# Altium PCB PCB1V1.2.PcbDoc (part 1 of 3)
Units mm, origin at the board's own origin, x right, y up, seen from the top; angles counter-clockwise.
Board outline 74.8 x 89.66 mm, 2 copper layers (Top Layer, Bottom Layer); 292 components, 184 nets, 916 pads, 196 vias.
Unrouted connection lines stored in the file: 106.
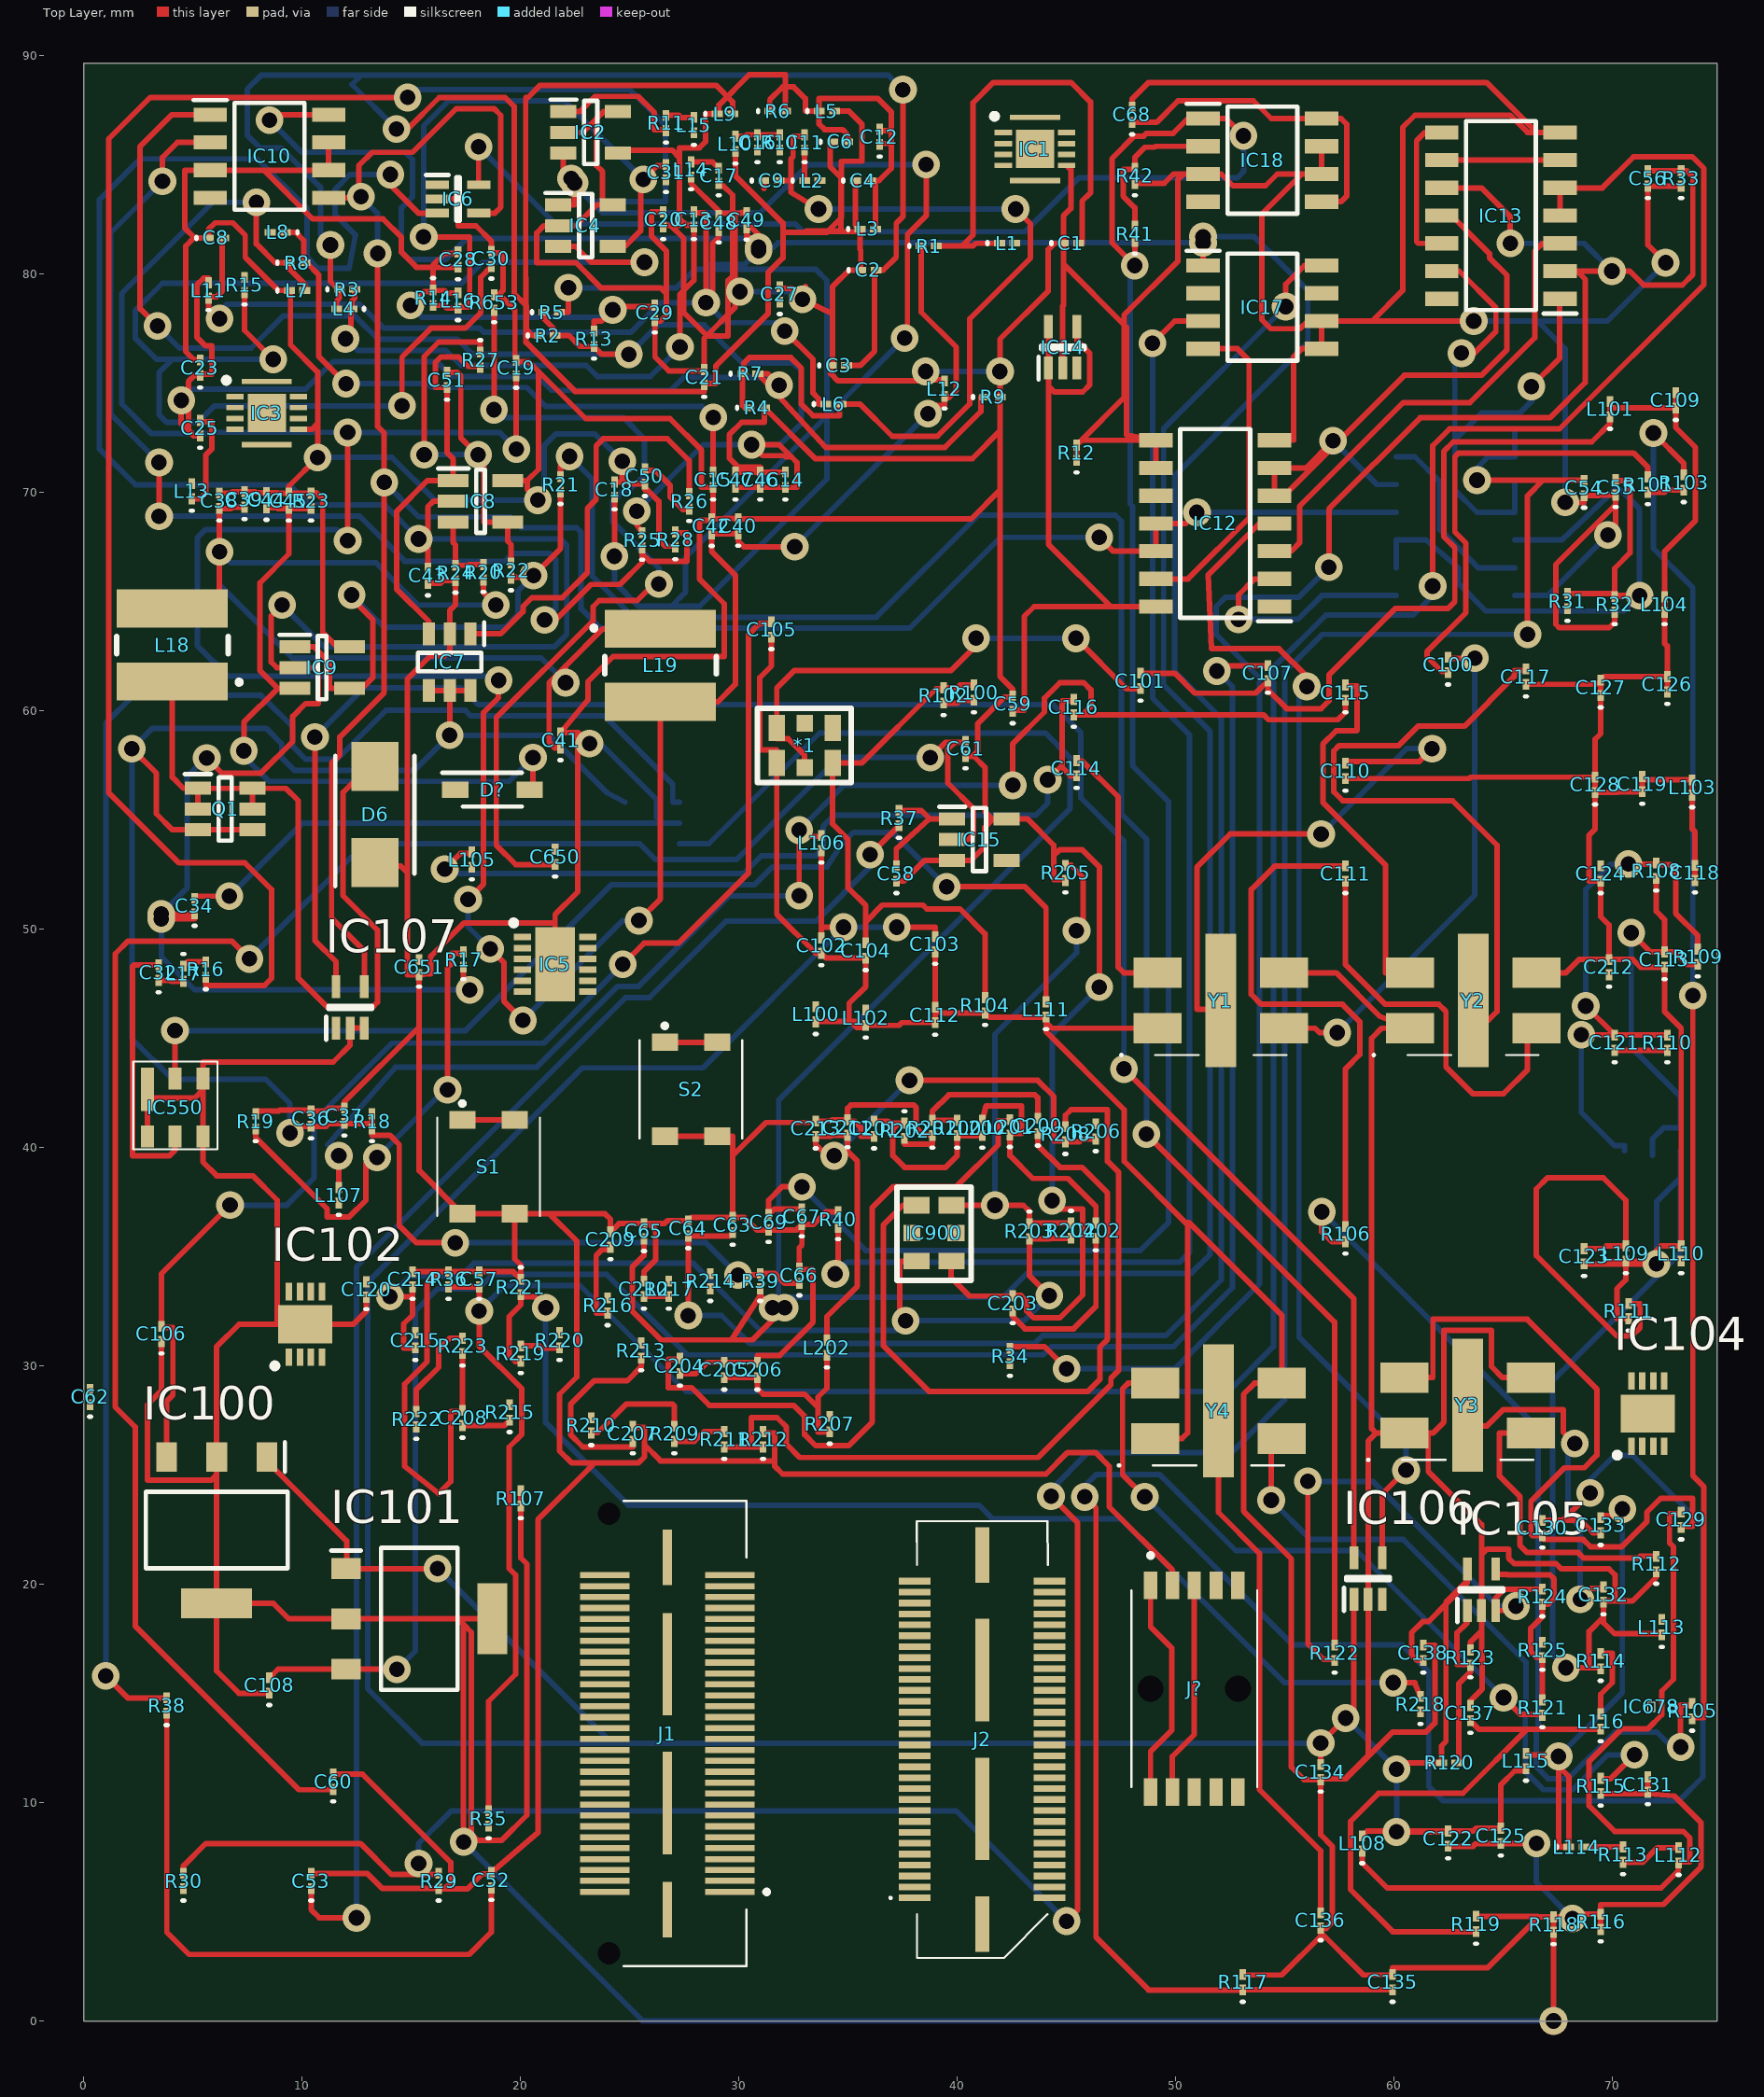
[diagram p0: Top Layer view]
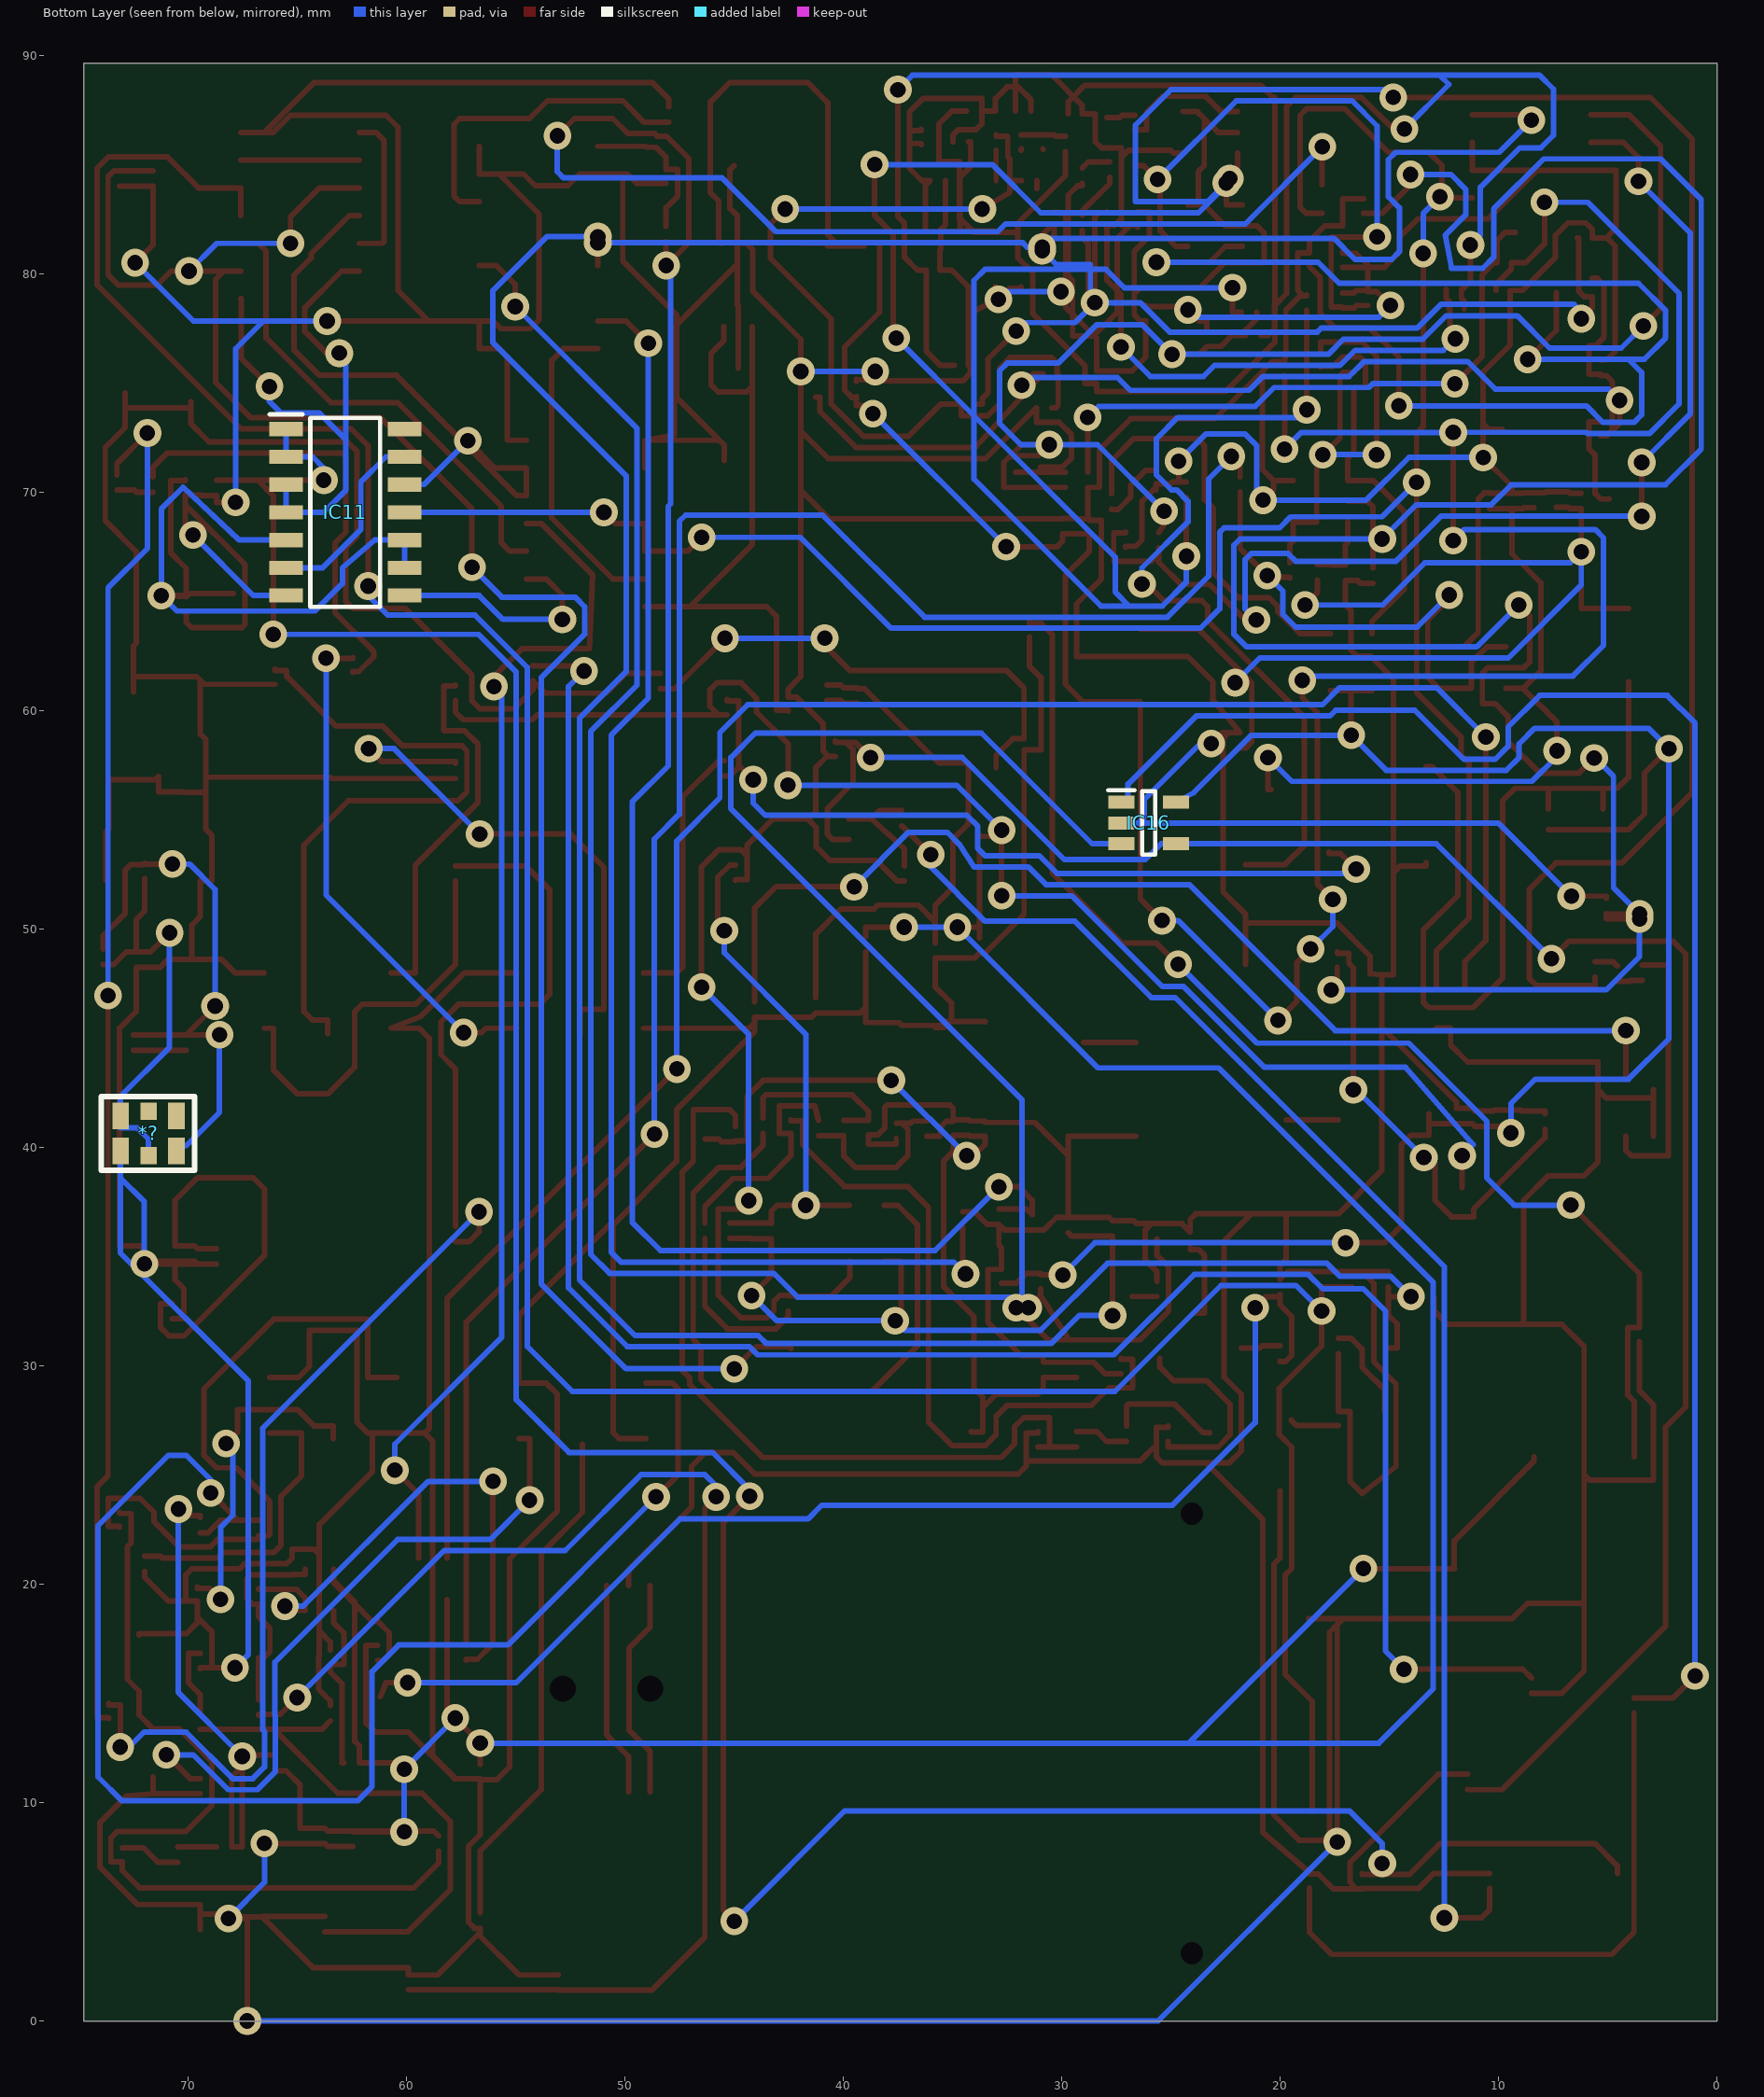
[diagram p1: Bottom Layer view, seen from below]

## Layer stack, top to bottom
Top Solder: solder mask 0.0102, Solder Resist, Dk 3.5
Top Layer: signal copper 0.0356
Dielectric 1: dielectric 0.32, FR-4, Dk 4.8
Bottom Layer: signal copper 0.0356
Bottom Solder: solder mask 0.0102, Solder Resist, Dk 3.5

## Board outline
0,0 74.803,0 74.803,89.662 0,89.662

## Design rules (kind name [scope] priority, off if disabled: settings)
Clearance [All] p1: gap=0.254 ignorepadtopadclearanceinfootprint=FALSE except(0: Arc-Hole Track-Hole SMDPad-SMDPad SMDPad-Hole THPad-Hole Via-Hole Fill-Hole Poly-Hole Region-Hole Text-Hole)
PolygonConnect [All] p1: connectstyle=Relief reliefconductorwidth=0.254 reliefentries=4 polygonreliefangle="90 Angle" airgapwidth=0.254
RoutingVias [All] p1: holewidth=0.711 width=1.27 viastyle="Through Hole" minholewidth=0.711 minwidth=1.27 maxholewidth=0.711 maxwidth=1.27
SolderMaskExpansion [All] p1: expansion=0.102 istentingtop=FALSE
Width [All] p1: maxlimit=0.254 minlimit=0.254 preferedwidth=0.254
30 further rules are at their usual default settings.

## Classes and differential pairs
component class TELEMETRY: C200 C201 C202 C203 C204 C205 C206 C207 C208 C209 C210 C211 C212 C213 C214 C215 IC200 IC201 IC202 IC203 IC900 L200 L201 L202 R200 R201 R202 R203 R204 R205 R206 R207 R208 R209 R210 R211 R212 R213 R214 R215 R216 R217 R218 R219 R220 R221 R222 R223
component class Sheet1: C52 C53 C54 C55 C56 C57 C58 C59 C60 C61 C62 C63 C64 C65 C66 C67 C68 C69 IC11 IC12 IC13 IC14 IC15 IC16 IC17 IC18 J1 J2 J? R29 R30 R31 R32 R33 R34 R35 R36 R37 R38 R39 R40 R41 R42 S1 S2
component class PA: C1 C2 C3 C4 C6 C8 C9 C11 C12 C13 C14 C15 C16 C17 C18 C19 C20 C21 C23 C25 C27 C28 C29 C30 C31 C32 C34 C36 C37 C38 C39 C40 C41 C42 C43 C44 C45 C46 C47 C48 C49 C50 C51 C650 C651 D6 D? IC1 IC2 IC3 IC4 IC5 IC6 IC7 IC8 IC9 IC10 L1 L2 L3 L4 L5 L6 L7 L8 L9 L10 L11 L12 L13 L14 L15 L16 L17 L18 L19 Q1 R1 R2 R3 R4 R5 R6 R7 R8 R9 R10 R11 R12 R13 R14 R15 R16 R17 R18 R19 R20 R21 R22 R23 R24 R25 R26 R27 R28 R653
component class "Mixers and IF": *1 *? C100 C101 C102 C103 C104 C105 C106 C107 C108 C109 C110 C111 C112 C113 C114 C115 C116 C117 C118 C119 C120 C121 C122 C123 C124 C125 C126 C127 C128 C129 C130 C131 C132 C133 C134 C135 C136 C137 C138 IC100 IC101 IC102 IC103 IC104 IC105 IC106 IC107 IC550 IC678 L100 L101 L102 L103 L104 L105 L106 L107 L108 L109 L110 L111 L112 L113 L114 L115 L116 R100 R101 R102 R103 R104 R105 R106 R107 R108 R109 R110 R111 R112 R113 R114 R115 R116 R117 R118 R119 R120 R121 R122 R123 R124 R125 Y1 Y2 Y3 Y4

## Components (designator, comment, footprint, x,y, rotation, side; value= is the part's Value field where it differs from the comment)
*1 "MQF326D REp" MQF326D 31.743,57.603 r0 top
*? "MQF326D REp" MQF326D 73.111,39.835 r180 bottom
C1 "Cap" 0603 45.212,81.407 r0 top value=33pF
C2 "Cap" 0603 35.937,80.18 r0 top value=1uF
C3 "Cap" 0603 34.588,75.814 r0 top value=470pF
C4 "Cap" 0603 35.687,84.28 r0 top value=12pF
C6 "Cap" 0603 34.64,86.058 r0 top value=5.1pF
C8 "Cap" 0603 6.065,81.661 r0 top value=10pF
C9 "Cap" 0603 31.496,84.28 r0 top value=5.1pF
C11 "Cap" 0603 33.02,86.027 r90 top value=470pF
C12 "Cap" 0603 36.449,86.281 r90 top value=470pF
C13 "Cap" 0603 27.94,82.502 r90 top value=470pF
C14 "Cap" 0603 32.131,70.581 r90 top value=10nF
C15 "Cap" 0603 28.829,70.581 r90 top value=33pF
C16 "Cap" 0603 30.861,86.027 r90 top value=6.8pF
C17 "Cap" 0603 29.083,84.503 r90 top value=470pF
C18 "Cap" 0603 24.305,70.129 r90 top value=470pF
C19 "Cap" 0603 19.812,75.692 r90 top value=470pF
C20 "Cap" 0603 26.543,82.502 r90 top value=5.1pF
C21 "Cap" 0603 28.417,75.28 r90 top value=16pF
C23 "Cap" 0603 5.334,75.709 r90 top value=5.1pF
C25 "Cap" 0603 5.334,72.946 r90 top value=470pF
C27 "Cap" 0603 31.873,79.068 r90 top value=12pF
C28 "Cap" 0603 17.145,80.662 r90 top value=470pF
C29 "Cap" 0603 26.162,78.224 r90 top value=1uF
C30 "Cap" 0603 18.669,80.693 r90 top value=470pF
C31 "Cap" 0603 26.67,84.661 r90 top value=470pF
C32 "Cap" 0603 3.429,48.006 r90 top value=470pF
C34 "Cap" 0603 5.08,51.054 r90 top value=1uF
C36 "Cap" 0603 10.414,41.323 r90 top value=4.7uF
C37 "Cap" 0603 11.938,41.45 r90 top value=4.7uF
C38 "Cap" 0603 6.223,69.613 r90 top value=22uF
C39 "Cap" 0603 7.366,69.675 r90 top value=22uF
C40 "Cap" 0603 29.972,68.453 r90 top value=47uF
C41 "Cap" 0603 21.844,58.643 r90 top value=.1uF
C42 "Cap" 0603 28.75,68.447 r90 top value=47uF
C43 "Cap" 0603 15.761,66.184 r90 top value=1uF
C44 "Cap" 0603 8.382,69.644 r90 top value=4.7uF
C45 "Cap" 0603 9.398,69.613 r90 top value=4.7uF
C46 "Cap" 0603 30.988,70.581 r90 top value=4.7uF
C47 "Cap" 0603 29.845,70.581 r90 top value=4.7uF
C48 "Cap" 0603 29.083,82.344 r90 top value=1uF
C49 "Cap" 0603 30.353,82.471 r90 top value=470pF
C50 "Cap" 0603 25.702,70.733 r90 top value=220pF
C51 "Cap" 0603 16.637,75.153 r90 top value=.1uF
C52 "Cap" 0603 18.669,6.446 r90 top value=470pF
C53 "Cap" 0603 10.418,6.412 r90 top value=470pF
C54 "Cap" 0603 68.707,70.2 r90 top value=470pF
C55 "Cap" 0603 70.152,70.231 r90 top value=470pF
C56 "Cap" 0603 71.628,84.376 r90 top value=470pF
C57 "Cap" 0603 18.113,33.965 r90 top value=470pF
C58 "Cap" 0603 37.211,52.547 r90 top value=470pF
C59 "Cap" 0603 42.545,60.325 r90 top value=.1uF
C60 "Cap" 0603 11.43,10.953 r90 top value=.1uF
C61 "Cap" 0603 40.386,58.262 r90 top value=.1uF
C62 "Cap" 0603 0.3,28.575 r90 top value=470pF
C63 "Cap" 0603 29.718,36.449 r90 top value=4.7uF
C64 "Cap" 0603 27.686,36.291 r90 top value=4.7uF
C65 "Cap" 0603 25.654,36.164 r90 top value=.1uF
C66 "Cap" 0603 32.766,34.132 r90 top value=.1uF
C67 "Cap" 0603 32.893,36.83 r90 top value=4.7uF
C68 "Cap" 0603 48.006,87.297 r90 top value=1uF
C69 "Cap" 0603 31.369,36.576 r90 top value=4.7uF
C100 "Cap" 0603 62.484,62.103 r90 top value=470pF
C101 "Cap" 0603 48.387,61.372 r90 top value=1nF
C102 "Cap" 0603 33.782,49.245 r90 top value=1nF
C103 "Cap" 0603 38.989,49.307 r90 top value=1nF
C104 "Cap" 0603 35.814,49.022 r90 top value=1nF
C105 "Cap" 0603 31.496,63.723 r90 top value=4.7uF
C106 "Cap" 0603 3.556,31.465 r90 top value=4.7uF
C107 "Cap" 0603 54.229,61.722 r90 top value=4.7uF
C108 "Cap" 0603 8.509,15.367 r90 top value=4.7uF
C109 "Cap" 0603 72.898,74.216 r90 top value=16pF
C110 "Cap" 0603 57.785,57.246 r90 top value=1.8pF
C111 "Cap" 0603 57.785,52.547 r90 top value=470pF
C112 "Cap" 0603 38.989,46.07 r90 top value=22pF
C113 "Cap" 0603 72.39,48.61 r90 top value=470pF
C114 "Cap" 0603 45.466,57.373 r90 top value=470pF
C115 "Cap" 0603 57.785,60.833 r90 top value=470pF
C116 "Cap" 0603 45.339,60.167 r90 top value=.5pF
C117 "Cap" 0603 66.04,61.564 r90 top value=1.8pF
C118 "Cap" 0603 73.787,52.578 r90 top value=82pF
C119 "Cap" 0603 71.374,56.642 r90 top value=82pF
C120 "Cap" 0603 12.954,33.497 r90 top value=1nF
C121 "Cap" 0603 70.104,44.8 r90 top value=1nF
C122 "Cap" 0603 62.484,8.351 r90 top value=1.8pF
C123 "Cap" 0603 68.707,35.021 r90 top value=1.8pF
C124 "Cap" 0603 69.469,52.547 r90 top value=1.8pF
C125 "Cap" 0603 64.897,8.478 r90 top value=1nF
C126 "Cap" 0603 72.517,61.214 r90 top value=1.8pF
C127 "Cap" 0603 69.469,61.056 r90 top value=3.9pF
C128 "Cap" 0603 69.215,56.611 r90 top value=1.8pF
C129 "Cap" 0603 73.152,22.956 r90 top value=470pF
C130 "Cap" 0603 66.802,22.575 r90 top value=1.2pF
C131 "Cap" 0603 71.628,10.826 r90 top value=470pF
C132 "Cap" 0603 69.596,19.527 r90 top value=1.8pF
C133 "Cap" 0603 69.469,22.702 r90 top value=470pF
C134 "Cap" 0603 56.642,11.399 r90 top value=1nF
C135 "Cap" 0603 59.94,1.778 r90 top value=1nF
C136 "Cap" 0603 56.642,4.603 r90 top value=1.8pF
C137 "Cap" 0603 63.5,14.097 r90 top value=1nF
C138 "Cap" 0603 61.341,16.86 r90 top value=1nF
C200 "Cap" 0603 43.688,40.99 r90 top value=10nF
C201 "Cap" 0603 36.195,40.863 r90 top value=180pF
C202 "Cap" 0603 46.355,36.195 r90 top value=560pF
C203 "Cap" 0603 42.545,32.862 r90 top value=270pF
C204 "Cap" 0603 27.305,29.998 r90 top value=270pF
C205 "Cap" 0603 29.337,29.814 r90 top value=1nF
C206 "Cap" 0603 30.861,29.814 r90 top value=4.7uF
C207 "Cap" 0603 25.146,26.893 r90 top value=2.2pF
C208 "Cap" 0603 17.351,27.615 r90 top value=2.2pF
C209 "Cap" 0603 24.13,35.783 r90 top value=2.2pF
C210 "Cap" 0603 25.654,33.528 r90 top value=2.2pF
C211 "Cap" 0603 34.986,40.913 r90 top value=1nF
C212 "Cap" 0603 69.85,48.26 r90 top value=10nF
C213 "Cap" 0603 33.528,40.863 r90 top value=1nF
C214 "Cap" 0603 15.065,33.965 r90 top value=4.7uF
C215 "Cap" 0603 15.192,31.171 r90 top value=4.7uF
C650 "Cap" 0603 21.59,53.309 r90 top value=39pF
C651 "Cap" 0603 15.367,48.26 r90 top value=39pF
D6 "MBRS120T3G" DIOM5436X247N 13.335,55.245 r90 top
D? "BAT46W-7-F" SOD3716X145N 18.718,56.388 r0 top
IC1 "RFPA0133TR7" QFN50P300X300X86-17N-D 43.561,85.725 r0 top
IC2 "RF2878SR" SOT95P280X159-5N 23.221,86.487 r0 top
IC3 "RFPA0133TR7" QFN50P300X300X86-17N-D 8.386,73.634 r0 top
IC4 "RF2878SR" SOT95P280X159-5N 22.987,82.217 r0 top
IC5 "LTC5533EDE#PBF" SON50P300X400X85-13N-D 21.59,48.387 r0 top
IC6 "FPF2000" SOT65P210X110-5N 17.145,83.439 r0 top
IC7 "LTC1772CS6#TRMPBF" SOT95P280X100-6N 16.764,62.23 r270 top
IC8 "MCP6231UT-E_OT" SOT95P270X145-5N 18.174,69.596 r0 top
IC9 "MCP6231UT-E_OT" SOT95P270X145-5N 10.922,61.976 r0 top
IC10 "LT1963AES8-3.3#PBF" SOIC127P599X175-8N 8.509,85.392 r0 top
IC11 "SN74HC00D" SOIC127P600X175-14N 62.82,69.088 r180 bottom
IC12 "MM74HC02M" SOIC127P600X175-14N 51.816,68.58 r180 top
IC13 "SN74HC00D" SOIC127P600X175-14N 64.897,82.677 r180 top
IC14 "FPF2000" SOT65P210X110-5N 44.831,76.642 r90 top
IC15 "TMP36GRTZ-REEL7" SOT95P280X145-5N 41.021,54.102 r0 top
IC16 "INA194AIDBVT" SOT95P280X145-5N 26.035,54.864 r180 bottom
IC17 "FPF2700MX" SOIC127P600X175-8N 53.975,78.486 r0 top
IC18 "LT1963AES8-3.3#PBF" SOIC127P599X175-8N 53.975,85.217 r0 top
IC100 "LT1963EST-2.5" SOT230P700X180-4N 6.096,22.479 r270 top
IC101 "LT1963EST-2.5" SOT230P700X180-4N 15.367,18.415 r0 top
IC102 "LT5560EDD#PBF" SON50P300X300X80-9N-D 10.156,31.901 r90 top
IC104 "LT5560EDD#PBF" SON50P300X300X80-9N-D 71.628,27.813 r90 top
IC105 "MCP6231UT-E_LT" SOT65P210X110-5N 64.008,19.746 r90 top
IC106 "FPF2004" SOT65P210X110-5N 58.816,20.254 r90 top
IC107 "FPF2000" SOT65P210X110-5N 12.207,46.416 r90 top
IC550 "AFS434S3-T" AFS434S3 6.155,39.879 r90 top
IC678 "rf2637" RF2637 71.755,14.307 r90 top
IC900 "MQF326D REp" MQF326D 39.751,34.798 r90 top
J1 "QSH-030-01-L-D-A-K" QSH03001LDAK 26.726,13.164 r90 top
J2 "QTH-030-02-L-D-A" QTH03002LDA 41.148,12.89 r90 top
J? "FSI-105-06-L-D-AD-TR" FSI10506LDADTR 50.857,15.218 r0 top
L1 "Inductor" 0603 42.291,81.407 r0 top value=8.7nH
L2 "Inductor" 0603 33.37,84.28 r0 top value=18nH
L3 "Inductor" 0603 35.906,82.068 r0 top value=10.4nH
L4 "Inductor" 0603 11.938,78.407 r180 top value=18nH
L5 "Inductor" 0603 34.036,87.455 r0 top value=25nH
L6 "Inductor" 0603 34.338,74.041 r0 top value=25nH
L7 "Inductor" 0603 9.779,79.248 r0 top value=18nH
L8 "Inductor" 0603 8.89,81.915 r180 top value=8.7nH
L9 "Inductor" 0603 29.368,87.328 r0 top value=25nH
L10 "Inductor" 0603 29.845,85.962 r90 top value=18nH
L11 "Inductor" 0603 5.715,79.248 r90 top value=25nH
L12 "Inductor" 0603 39.418,74.747 r90 top value=18nH
L13 "Inductor" 0603 4.953,70.056 r90 top value=18nH
L14 "Inductor" 0603 27.813,84.788 r90 top value=10.4nH
L15 "Inductor" 0603 27.94,86.82 r90 top value=39nH
L16 "Inductor" 0603 17.145,78.788 r90 top value=18nH
L17 "Inductor" 0603 4.572,47.958 r270 top value=39nH
L18 "MSS5131-472MLB" MSS5131 4.064,63.011 r180 top
L19 "MSS5131-103MLB" MSS5131 26.416,62.084 r0 top
L100 "Inductor" 0603 33.528,46.101 r90 top value=18nH
L101 "Inductor" 0603 69.898,73.81 r90 top value=10mH
L102 "Inductor" 0603 35.814,45.943 r90 top value=18nH
L103 "Inductor" 0603 73.66,56.484 r90 top value=?????
L104 "Inductor" 0603 72.39,64.866 r90 top value=?????
L105 "Inductor" 0603 17.78,53.182 r90 top value=2.7uH
L106 "Inductor" 0603 33.782,53.944 r90 top value=8.2uH
L107 "Inductor" 0603 11.684,37.815 r90 top value=2.7uH
L108 "Inductor" 0603 58.547,8.128 r90 top value=8.2uH
L109 "Inductor" 0603 70.612,35.148 r90 top value=18nH
L110 "Inductor" 0603 73.152,35.148 r90 top value=68nH
L111 "Inductor" 0603 44.069,46.324 r90 top value=8.2nH
L112 "Inductor" 0603 73.025,7.589 r90 top value=2.2uH
L113 "Inductor" 0603 72.263,18.034 r90 top value=68nH
L114 "Inductor" 0603 68.357,7.97 r0 top value=2.2uH
L115 "Inductor" 0603 66.04,11.907 r90 top value=8.2uH
L116 "Inductor" 0603 69.469,13.716 r90 top value=1.5uH
L200 "Inductor" 0603 41.148,40.894 r90 top value=120nH
L201 "Inductor" 0603 42.418,40.925 r90 top value=47nH
L202 "Inductor" 0603 34.036,30.83 r90 top value=330nH
Q1 "FDC638P" SOT95P280X110-6N 6.477,55.499 r0 top
R1 "Res1" 0603 38.704,81.28 r0 top value=10
R2 "Res1" 0603 21.24,77.185 r0 top value=560
R3 "Res1" 0603 12.065,79.296 r0 top value=510
R4 "Res1" 0603 30.824,73.878 r0 top value=200
R5 "Res1" 0603 21.432,78.249 r0 top value=1.8k
R6 "Res1" 0603 31.781,87.455 r0 top value=100
R7 "Res1" 0603 30.528,75.438 r0 top value=100
R8 "Res1" 0603 9.779,80.518 r0 top value=10
R9 "Res1" 0603 41.623,74.366 r0 top value=200
R10 "Res1" 0603 31.877,86.027 r90 top value=1.5k
R11 "Res1" 0603 26.67,86.916 r90 top value=15
R12 "Res1" 0603 45.462,71.815 r90 top value=49.9
R13 "Res1" 0603 23.368,77.033 r90 top value=1.2k
R14 "Res1" 0603 16.002,78.915 r270 top value=510
R15 "Res1" 0603 7.366,79.502 r90 top value=2k
R16 "Res1" 0603 5.588,48.15 r90 top value=15
R17 "Res1" 0603 17.399,48.61 r90 top value=68k
R18 "Res1" 0603 13.208,41.196 r90 top value=.03
R19 "Res1" 0603 7.878,41.196 r90 top value=12k
R20 "Res1" 0603 18.301,66.342 r90 top value=100k
R21 "Res1" 0603 21.844,70.369 r90 top value=4.7k
R22 "Res1" 0603 19.571,66.421 r90 top value=1.8k
R23 "Res1" 0603 10.414,69.613 r90 top value=470k
R24 "Res1" 0603 17.031,66.311 r90 top value=200k
R25 "Res1" 0603 25.575,67.812 r90 top value=5.11k
R26 "Res1" 0603 27.734,69.59 r90 top value=10k
R27 "Res1" 0603 18.161,76.073 r270 top value=300k
R28 "Res1" 0603 27.099,67.843 r90 top value=3.83k
R29 "Res1" 0603 16.26,6.412 r90 top value=1M
R30 "Res1" 0603 4.576,6.412 r90 top value=100
R31 "Res1" 0603 67.945,65.024 r90 top value=100
R32 "Res1" 0603 70.104,64.866 r90 top value=1M
R33 "Res1" 0603 73.152,84.376 r90 top value=1M
R34 "Res1" 0603 42.418,30.449 r90 top value=100
R35 "Res1" 0603 18.542,9.271 r90 top value=100
R36 "Res1" 0603 16.716,33.965 r90 top value=1M
R37 "Res1" 0603 37.338,55.087 r90 top value=100
R38 "Res1" 0603 3.81,14.447 r90 top value=100
R39 "Res1" 0603 30.988,33.878 r90 top value=.1
R40 "Res1" 0603 34.544,36.703 r90 top value=430k
R41 "Res1" 0603 48.133,81.836 r90 top value=5.76k
R42 "Res1" 0603 48.133,84.503 r90 top value=3.83k
R100 "Res1" 0603 40.767,60.833 r90 top value=TBD
R101 "Res1" 0603 71.628,70.358 r90 top value=470
R102 "Res1" 0603 39.37,60.706 r90 top value=10k
R103 "Res1" 0603 73.279,70.454 r90 top value=470
R104 "Res1" 0603 41.275,46.513 r90 top value=15k
R105 "Res1" 0603 73.66,14.193 r90 top value=2.2k
R106 "Res1" 0603 57.785,36.037 r90 top value=470
R107 "Res1" 0603 20.018,23.932 r90 top value=1K
R108 "Res1" 0603 72.009,52.674 r90 top value=TBD
R109 "Res1" 0603 73.914,48.737 r90 top value=15k
R110 "Res1" 0603 72.517,44.8 r90 top value=10k
R111 "Res1" 0603 70.739,32.512 r90 top value=470
R112 "Res1" 0603 72.009,20.924 r90 top value=560
R113 "Res1" 0603 70.485,7.62 r90 top value=510
R114 "Res1" 0603 69.469,16.479 r90 top value=470
R115 "Res1" 0603 69.469,10.764 r90 top value=560
R116 "Res1" 0603 69.469,4.541 r90 top value=62
R117 "Res1" 0603 53.082,1.778 r90 top value=2.7k
R118 "Res1" 0603 67.31,4.414 r90 top value=470
R119 "Res1" 0603 63.754,4.445 r90 top value=5.1
R120 "Res1" 0603 62.532,11.828 r0 top value=2.2k
R121 "Res1" 0603 66.802,14.351 r90 top value=1k
R122 "Res1" 0603 57.277,16.86 r90 top value=1k
R123 "Res1" 0603 63.5,16.637 r90 top value=10k
R124 "Res1" 0603 66.802,19.431 r90 top value=10k
R125 "Res1" 0603 66.802,16.987 r90 top value=4.7k
R200 "Res1" 0603 40.005,40.894 r90 top value=68
R201 "Res1" 0603 38.862,40.894 r90 top value=100
R202 "Res1" 0603 37.592,40.767 r270 top value=100
R203 "Res1" 0603 43.307,36.164 r270 top value=TBD
R204 "Res1" 0603 45.212,36.195 r270 top value=10K
R205 "Res1" 0603 44.958,52.578 r90 top value=15K
R206 "Res1" 0603 46.355,40.736 r90 top value=10k
R207 "Res1" 0603 34.163,27.336 r90 top value=1k
R208 "Res1" 0603 44.958,40.609 r90 top value=10k
R209 "Res1" 0603 27.051,26.893 r90 top value=20k
R210 "Res1" 0603 23.241,27.274 r90 top value=200
R211 "Res1" 0603 29.337,26.639 r90 top value=10k
R212 "Res1" 0603 31.115,26.639 r90 top value=1K
R213 "Res1" 0603 25.527,30.703 r90 top value=1K
R214 "Res1" 0603 28.702,33.878 r90 top value=200
R215 "Res1" 0603 19.51,27.869 r90 top value=1K
R216 "Res1" 0603 24.003,32.766 r90 top value=1K
R217 "Res1" 0603 26.797,33.528 r90 top value=1K
R218 "Res1" 0603 61.214,14.509 r90 top value=1k
R219 "Res1" 0603 20.018,30.567 r90 top value=10k
R220 "Res1" 0603 21.796,31.171 r90 top value=20k
R221 "Res1" 0603 20.018,33.615 r270 top value=1.5k
R222 "Res1" 0603 15.24,27.559 r90 top value=56k
R223 "Res1" 0603 17.351,30.917 r90 top value=48.7k
R653 "Res1" 0603 18.796,78.692 r90 top value=1.5k
S1 "HDT0004" HDT0004 18.542,39.116 r0 top
S2 "HDT0004" HDT0004 27.813,42.672 r0 top
Y1 "ECS-75SMF45A30B" ECS75SMF45A30B 52.07,46.735 r0 top
Y2 "ECS-75SMF45A30B" ECS75SMF45A30B 63.627,46.735 r0 top
Y3 "ECS-75SMF45A30B" ECS75SMF45A30B 63.373,28.193 r0 top
Y4 "ECS-75SMF45A30B" ECS75SMF45A30B 51.964,27.94 r0 top

## Footprints (in the part's own frame and the unit in brackets; to place one, negate y for a bottom-side part, rotate by r counter-clockwise, add the part's x,y. Pads: shape width x height; smd on the part's side, far side on the other; paste and mask are expansions set on the pad)
0603 [mm] "Chip Inductor, Body 0.6x0.3mm, IPC High Density"
  rect 0.5x0.3 smd: 1(-0.35,0) 2(0.35,0)
  silkscreen extent -0.9,-0.05 -0.9,0.05, body extent -0.33,-0.18 0.33,0.18, height 0.55
AFS434S3 [mm]
  rect 2x0.6 smd: 1(2.784,3.233)
  rect 1x0.6 smd: 2(3.284,1.973) 3(3.284,0.694) 4(0.634,0.694) 5(0.634,1.966) 6(0.634,3.234)
  silkscreen extent 0.04,0.03 4.05,3.89
DIOM5436X247N [mm]
  rect 2.25x2.15 smd: 1(-2.2,0) 2(2.2,0)
  silkscreen extent -3.27,-1.81 2.7,1.81, body extent -2.7,-1.81 2.7,1.81, height 2.47
ECS75SMF45A30B [mm]
  rect 2.2x1.4 smd: 1(-2.9,-1.27) 3(2.9,-1.27) 4(2.9,1.27) 6(-2.9,1.27)
  rect 1.4x3.05 smd: 2(0,-1.525) 5(0,1.525)
  silkscreen extent -4.6,-2.55 3,-2.45, body extent -3.86,-2.91 3.86,13.05, height 10
FSI10506LDADTR [mm]
  rect 0.61x1.26 smd: 1(-2,4.73) 2(-2,-4.73) 3(-1,4.73) 4(-1,-4.73) 5(0,4.73) 6(0,-4.73) 7(1,4.73) 8(1,-4.73) 9(2,4.73) 10(2,-4.73)
  round 0.595 hole 1.19 unplated: MH1(-2,0) MH2(2,0)
  silkscreen extent -2.88,-4.51 2.88,6.2, body extent -2.88,-5.3 2.88,5.3, height 7.5
HDT0004 [mm]
  rect 1.2x0.8 smd: 1(-1.2,2.15) 2(1.2,2.15) 3(-1.2,-2.15) 4(1.2,-2.15)
  silkscreen extent -2.35,-2.25 2.35,3, body extent -2.35,-2.47 2.35,2.47, height 3.1
MQF326D [mm]
  rect 0.75x1.2 smd: 1(2.557,0.011) 3(-0.004,0.011) 4(2.557,1.611) 6(-0.004,1.611)
  rect 0.75x0.78 smd: 2(1.277,-0.199) 5(1.277,1.821)
  silkscreen extent -0.89,-0.88 3.4,2.5
MSS5131 [mm]
  rect 5.08x1.74 smd: 1(0,1.67) 2(0,-1.67)
  silkscreen extent -3.14,-0.4 2.55,1.78
QFN50P300X300X86-17N-D [mm]
  rect 0.8x0.25 smd: 1(-1.45,0.75) 2(-1.45,0.25) 3(-1.45,-0.25) 4(-1.45,-0.75) 5(-0.75,-1.45) 6(-0.25,-1.45) 7(0.25,-1.45) 8(0.75,-1.45) 9(1.45,-0.75) 10(1.45,-0.25) 11(1.45,0.25) 12(1.45,0.75) 13(0.75,1.45) 14(0.25,1.45) 15(-0.25,1.45) 16(-0.75,1.45)
  rect 1.75x1.75 smd: 17(0,0)
  silkscreen extent -1.97,1.38 -1.72,1.62, body extent -1.55,-1.55 1.55,1.55, height 0.85
QSH03001LDAK [mm]
  rect 0.279x2.27 smd: 1(-7.25,-2.865) 2(-7.25,2.865) 3(-6.75,-2.865) 4(-6.75,2.865) 5(-6.25,-2.865) 6(-6.25,2.865) 7(-5.75,-2.865) 8(-5.75,2.865) 9(-5.25,-2.865) 10(-5.25,2.865) 11(-4.75,-2.865) 12(-4.75,2.865) 13(-4.25,-2.865) 14(-4.25,2.865) 15(-3.75,-2.865) 16(-3.75,2.865) 17(-3.25,-2.865) 18(-3.25,2.865) 19(-2.75,-2.865) 20(-2.75,2.865) 21(-2.25,-2.865) 22(-2.25,2.865) 23(-1.75,-2.865) 24(-1.75,2.865) 25(-1.25,-2.865) 26(-1.25,2.865) 27(-0.75,-2.865) 28(-0.75,2.865) 29(-0.25,-2.865) 30(-0.25,2.865) 31(0.25,-2.865) 32(0.25,2.865) 33(0.75,-2.865) 34(0.75,2.865) 35(1.25,-2.865) 36(1.25,2.865) 37(1.75,-2.865) 38(1.75,2.865) 39(2.25,-2.865) 40(2.25,2.865) 41(2.75,-2.865) 42(2.75,2.865) 43(3.25,-2.865) 44(3.25,2.865) 45(3.75,-2.865) 46(3.75,2.865) 47(4.25,-2.865) 48(4.25,2.865) 49(4.75,-2.865) 50(4.75,2.865) 51(5.25,-2.865) 52(5.25,2.865) 53(5.75,-2.865) 54(5.75,2.865) 55(6.25,-2.865) 56(6.25,2.865) 57(6.75,-2.865) 58(6.75,2.865) 59(7.25,-2.865) 60(7.25,2.865)
  round 0.51 hole 1.02 unplated: MH1(-10.065,2.67) MH2(10.065,2.67)
  rect 2.54x0.43 smd: MP1(-8.065,0) MP2(8.065,0)
  rect 4.7x0.43 smd: MP3(-3.175,0) MP4(3.175,0)
  silkscreen extent -10.65,-4.6 10.66,2, body extent -10.66,-3.97 10.66,3.97, height 3.45
QTH03002LDA [mm]
  rect 0.305x1.45 smd: 1(-7.25,3.086) 2(-7.25,-3.086) 3(-6.75,3.086) 4(-6.75,-3.086) 5(-6.25,3.086) 6(-6.25,-3.086) 7(-5.75,3.086) 8(-5.75,-3.086) 9(-5.25,3.086) 10(-5.25,-3.086) 11(-4.75,3.086) 12(-4.75,-3.086) 13(-4.25,3.086) 14(-4.25,-3.086) 15(-3.75,3.086) 16(-3.75,-3.086) 17(-3.25,3.086) 18(-3.25,-3.086) 19(-2.75,3.086) 20(-2.75,-3.086) 21(-2.25,3.086) 22(-2.25,-3.086) 23(-1.75,3.086) 24(-1.75,-3.086) 25(-1.25,3.086) 26(-1.25,-3.086) 27(-0.75,3.086) 28(-0.75,-3.086) 29(-0.25,3.086) 30(-0.25,-3.086) 31(0.25,3.086) 32(0.25,-3.086) 33(0.75,3.086) 34(0.75,-3.086) 35(1.25,3.086) 36(1.25,-3.086) 37(1.75,3.086) 38(1.75,-3.086) 39(2.25,3.086) 40(2.25,-3.086) 41(2.75,3.086) 42(2.75,-3.086) 43(3.25,3.086) 44(3.25,-3.086) 45(3.75,3.086) 46(3.75,-3.086) 47(4.25,3.086) 48(4.25,-3.086) 49(4.75,3.086) 50(4.75,-3.086) 51(5.25,3.086) 52(5.25,-3.086) 53(5.75,3.086) 54(5.75,-3.086) 55(6.25,3.086) 56(6.25,-3.086) 57(6.75,3.086) 58(6.75,-3.086) 59(7.25,3.086) 60(7.25,-3.086)
  rect 4.7x0.64 smd: 61(-3.175,0) 62(3.175,0)
  rect 2.54x0.64 smd: 63(8.445,0) 64(-8.445,0)
  silkscreen extent -10,-3 10,4.25, body extent -10,-3.78 10,3.78, height 7.16
RF2637 [mm]
  rect 0.025x0.012 smd: 1(0,0) 2(0,-0.026) 3(0,-0.051) 4(0,-0.077) 5(0.171,-0.077) 6(0.171,-0.051) 7(0.171,-0.026) 8(0.171,0)
  silkscreen extent -0.12,-0.19 0.29,0.11
SOD3716X145N [mm]
  rect 1.2x0.75 smd: 1(-1.7,0) 2(1.7,0)
  silkscreen extent -2.3,-0.78 1.35,0.78, body extent -1.85,-0.77 1.85,0.77, height 1.45
SOIC127P599X175-8N [mm]
  rect 1.526x0.65 smd: 1(-2.712,1.905) 2(-2.712,0.635) 3(-2.712,-0.635) 4(-2.712,-1.905) 5(2.712,-1.905) 6(2.712,-0.635) 7(2.712,0.635) 8(2.712,1.905)
  silkscreen extent -3.47,-2.45 1.6,2.58, body extent -3,-2.45 3,2.45, height 1.75
SOIC127P600X175-8N [mm]
  rect 1.525x0.65 smd: 1(-2.712,1.905) 2(-2.712,0.635) 3(-2.712,-0.635) 4(-2.712,-1.905) 5(2.712,-1.905) 6(2.712,-0.635) 7(2.712,0.635) 8(2.712,1.905)
  silkscreen extent -3.47,-2.45 1.6,2.58, body extent -3,-2.45 3,2.45, height 1.75
SOIC127P600X175-14N [mm]
  rect 1.525x0.65 smd: 1(-2.712,3.81) 2(-2.712,2.54) 3(-2.712,1.27) 4(-2.712,0) 5(-2.712,-1.27) 6(-2.712,-2.54) 7(-2.712,-3.81) 8(2.712,-3.81) 9(2.712,-2.54) 10(2.712,-1.27) 11(2.712,0) 12(2.712,1.27) 13(2.712,2.54) 14(2.712,3.81)
  silkscreen extent -3.48,-4.33 1.6,4.48, body extent -3,-4.33 3,4.33, height 1.75
SON50P300X300X80-9N-D [mm]
  rect 0.8x0.3 smd: 1(-1.5,0.75) 2(-1.5,0.25) 3(-1.5,-0.25) 4(-1.5,-0.75) 5(1.5,-0.75) 6(1.5,-0.25) 7(1.5,0.25) 8(1.5,0.75)
  rect 1.75x2.48 smd: 9(0,0)
  silkscreen extent -2.02,1.27 -1.78,1.52, body extent -1.55,-1.5 1.55,1.5, height 0.8
SON50P300X400X85-13N-D [mm]
  rect 0.8x0.3 smd: 1(-1.5,1.25) 2(-1.5,0.75) 3(-1.5,0.25) 4(-1.5,-0.25) 5(-1.5,-0.75) 6(-1.5,-1.25) 7(1.5,-1.25) 8(1.5,-0.75) 9(1.5,-0.25) 10(1.5,0.25) 11(1.5,0.75) 12(1.5,1.25)
  rect 1.8x3.4 smd: 13(0,0)
  silkscreen extent -2.02,1.78 -1.77,2.02, body extent -1.55,-2 1.55,2, height 0.85
SOT65P210X110-5N [mm]
  rect 1.05x0.4 smd: 1(-0.95,0.65) 2(-0.95,0) 3(-0.95,-0.65) 4(0.95,-0.65) 5(0.95,0.65)
  silkscreen extent -1.47,-1 0.07,1.1, body extent -1.05,-1 1.05,1, height 1.1
SOT95P270X145-5N [mm]
  rect 1.4x0.6 smd: 1(-1.25,0.95) 2(-1.25,0) 3(-1.25,-0.95) 4(1.25,-0.95) 5(1.25,0.95)
  silkscreen extent -1.95,-1.45 0.2,1.5, body extent -1.35,-1.45 1.35,1.45, height 1.45
SOT95P280X100-6N [mm]
  rect 1.05x0.55 smd: 1(-1.3,0.95) 2(-1.3,0) 3(-1.3,-0.95) 4(1.3,-0.95) 5(1.3,0) 6(1.3,0.95)
  silkscreen extent -1.82,-1.45 0.42,1.58, body extent -1.4,-1.45 1.4,1.45, height 1
SOT95P280X110-6N [mm]
  rect 1.2x0.6 smd: 1(-1.25,0.95) 2(-1.25,0) 3(-1.25,-0.95) 4(1.25,-0.95) 5(1.25,0) 6(1.25,0.95)
  silkscreen extent -1.85,-1.45 0.3,1.6, body extent -1.4,-1.45 1.4,1.45, height 1.1
SOT95P280X145-5N [mm]
  rect 1.2x0.6 smd: 1(-1.25,0.95) 2(-1.25,0) 3(-1.25,-0.95) 4(1.25,-0.95) 5(1.25,0.95)
  silkscreen extent -1.85,-1.45 0.3,1.5, body extent -1.4,-1.45 1.4,1.45, height 1.45
SOT95P280X159-5N [mm]
  rect 1.2x0.6 smd: 1(-1.25,0.95) 2(-1.25,0) 3(-1.25,-0.95) 4(1.25,-0.95) 5(1.25,0.95)
  silkscreen extent -1.85,-1.45 0.3,1.5, body extent -1.4,-1.45 1.4,1.45, height 1.59
SOT230P700X180-4N [mm]
  rect 1.35x0.95 smd: 1(-3.35,2.3) 2(-3.35,0) 3(-3.35,-2.3)
  rect 1.35x3.25 smd: 4(3.35,0)
  silkscreen extent -4.02,-3.25 1.75,3.25, body extent -3.5,-3.25 3.5,3.25, height 1.8

## Part data
*1 *? IC550 IC678 IC900: library part Component_1
C1 C2 C3 C4 C6 C8 C9 C11 C12 C13 C14 C15 C16 C17 C18 C19 C20 C21 C23 C25 C27 C28 C29 C30 C31 C32 C34 C36 C37 C38 C39 C40 C41 C42 C43 C44 C45 C46 C47 C48 C49 C50 C51 C52 C53 C54 C55 C56 C57 C58 C59 C60 C61 C62 C63 C64 C65 C66 C67 C68 C69 C100 C101 C102 C103 C104 C105 C106 C107 C108 C109 C110 C111 C112 C113 C114 C115 C116 C117 C118 C119 C120 C121 C122 C123 C124 C125 C126 C127 C128 C129 C130 C131 C132 C133 C134 C135 C136 C137 C138 C200 C201 C202 C203 C204 C205 C206 C207 C208 C209 C210 C211 C212 C213 C214 C215 C650 C651: "Capacitor", LatestRevisionDate=17-Jul-2002, LatestRevisionNote="Re-released for DXP Platform.", PackageDescription="Radial Cap, Thru-Hole; 2 Leads; 0.3 in Pin Spacing", PackageReference=RAD-0.3, Published=8-Jun-2000, Publisher="Altium Limited"
D6: "Diode", Manufacturer_Name="ON Semiconductor", Mouser Part Number=863-MBRS120T3G, RS Part Number=5452068P, Allied Price/Stock=http://www.alliedelec.com/on-semiconductor-mbrs120t3g/70339713/, Allied_Number=70339713, Datasheet Link=http://www.onsemi.com/pub/Collateral/MBRS120T3-D.PDF, Height=2.47mm, Manufacturer_Part_Number=MBRS120T3G, Mouser Price/Stock=https://www.mouser.com/Search/Refine.aspx?Keyword=863-MBRS120T3G, RS Price/Stock=http://uk.rs-online.com/web/p/products/5452068P
D?: "Diode", Manufacturer_Name="Diodes Inc.", Mouser Part Number=621-BAT46W-7-F, RS Part Number=7513373P, Allied Price/Stock=https://www.alliedelec.com/diodes-inc-bat46w-7-f/71028110/, Allied_Number=71028110, Datasheet Link=https://componentsearchengine.com/Datasheets/2/BAT46W-7-F.pdf, Height=1.45mm, Manufacturer_Part_Number=BAT46W-7-F, Mouser Price/Stock=https://www.mouser.com/Search/Refine.aspx?Keyword=621-BAT46W-7-F, RS Price/Stock=http://uk.rs-online.com/web/p/products/7513373P
IC1 IC3: "Integrated Circuit", Manufacturer_Name=Qorvo, Mouser Part Number=772-RFPA0133, Datasheet Link=http://www.qorvo.com/products/d/da000936, Height=0.855mm, Manufacturer_Part_Number=RFPA0133TR7, Mouser Price/Stock=https://www.mouser.com/Search/Refine.aspx?Keyword=772-RFPA0133
IC2 IC4: "Integrated Circuit", Manufacturer_Name=RFMD, Datasheet Link=https://datasheet.octopart.com/RF2878SR-RFMD-datasheet-17020116.pdf, Height=1.59mm, Manufacturer_Part_Number=RF2878SR
IC5: "Integrated Circuit", Manufacturer_Name="Linear Technology", Datasheet Link=https://componentsearchengine.com/Datasheets/2/LTC5533EDE#PBF.pdf, Height=0.85mm, Manufacturer_Part_Number=LTC5533EDE#PBF
IC6 IC14 IC107: "Integrated Circuit", Manufacturer_Name="ON Semiconductor", Mouser Part Number=512-FPF2000, RS Part Number=6709942P, Datasheet Link=https://www.onsemi.com/pub/Collateral/FPF2001-D.pdf, Height=1.1mm, Manufacturer_Part_Number=FPF2000, Mouser Price/Stock=https://www.mouser.com/Search/Refine.aspx?Keyword=512-FPF2000, RS Price/Stock=http://uk.rs-online.com/web/p/products/6709942P
IC7: "Integrated Circuit", Manufacturer_Name="Linear Technology", Mouser Part Number=584-LTC1772CS6TRMPBF, RS Part Number=0411891, Datasheet Link=http://docs-emea.rs-online.com/webdocs/0ab8/0900766b80ab84d2.pdf, Height=1mm, Manufacturer_Part_Number=LTC1772CS6#TRMPBF, Mouser Price/Stock=https://www.mouser.com/Search/Refine.aspx?Keyword=584-LTC1772CS6TRMPBF, RS Price/Stock=http://uk.rs-online.com/web/p/products/0411891
IC8 IC9: "Integrated Circuit", Manufacturer_Name=Microchip, Manufacturer_Part_Number=MCP6231UT-E/OT, Mouser Part Number=579-MCP6231UT-E/OT, RS Part Number=6674468, Allied Price/Stock=http://www.alliedelec.com/microchip-technology-inc-mcp6231ut-e-ot/70414221/, Allied_Number=70414221, Datasheet Link=http://ww1.microchip.com/downloads/en/DeviceDoc/21881e.pdf, Height=1.45mm, Mouser Price/Stock=https://www.mouser.com/Search/Refine.aspx?Keyword=579-MCP6231UT-E%2FOT, RS Price/Stock=https://uk.rs-online.com/web/p/products/6674468
IC10 IC18: "Integrated Circuit", Manufacturer_Name="Linear Technology", Mouser Part Number=584-1963AES8-3.3PBF, RS Part Number=7618550P, Datasheet Link=http://www.linear.com/docs/3709, Height=1.752mm, Manufacturer_Part_Number=LT1963AES8-3.3#PBF, Mouser Price/Stock=https://www.mouser.com/Search/Refine.aspx?Keyword=584-1963AES8-3.3PBF, RS Price/Stock=http://uk.rs-online.com/web/p/products/7618550P
IC11 IC13: "Integrated Circuit", Manufacturer_Name="Texas Instruments", Mouser Part Number=595-SN74HC00D, RS Part Number=0526234, Datasheet Link=http://www.ti.com/lit/gpn/sn74hc00, Height=1.75mm, Manufacturer_Part_Number=SN74HC00D, Mouser Price/Stock=https://www.mouser.com/Search/Refine.aspx?Keyword=595-SN74HC00D, RS Price/Stock=http://uk.rs-online.com/web/p/products/0526234
IC12: "Integrated Circuit", Manufacturer_Name="ON Semiconductor", Mouser Part Number=512-MM74HC02M, RS Part Number=7613555P, Datasheet Link=https://www.fairchildsemi.com/datasheets/MM/MM74HC02.pdf, Height=1.75mm, Manufacturer_Part_Number=MM74HC02M, Mouser Price/Stock=https://www.mouser.com/Search/Refine.aspx?Keyword=512-MM74HC02M, RS Price/Stock=http://uk.rs-online.com/web/p/products/7613555P
IC15: "Integrated Circuit", Manufacturer_Name="Analog Devices", Mouser Part Number=584-TMP36GRTZ-R7, RS Part Number=8099367P, Datasheet Link=http://componentsearchengine.com/Datasheets/3/TMP36GRTZ-REEL7.pdf, Height=1.45mm, Manufacturer_Part_Number=TMP36GRTZ-REEL7, Mouser Price/Stock=https://www.mouser.com/Search/Refine.aspx?Keyword=584-TMP36GRTZ-R7, RS Price/Stock=http://uk.rs-online.com/web/p/products/8099367P
IC16: "Integrated Circuit", Manufacturer_Name="Texas Instruments", Mouser Part Number=595-INA194AIDBVT, RS Part Number=5457625P, Datasheet Link=http://www.ti.com/lit/ds/symlink/ina194.pdf, Height=1.45mm, Manufacturer_Part_Number=INA194AIDBVT, Mouser Price/Stock=https://www.mouser.com/Search/Refine.aspx?Keyword=595-INA194AIDBVT, RS Price/Stock=http://uk.rs-online.com/web/p/products/5457625P
IC17: "Integrated Circuit", Manufacturer_Name="ON Semiconductor", Mouser Part Number=512-FPF2700MX, RS Part Number=8088966P, Datasheet Link=https://www.onsemi.com/pub/Collateral/FPF2702-D.pdf, Height=1.75mm, Manufacturer_Part_Number=FPF2700MX, Mouser Price/Stock=https://www.mouser.com/Search/Refine.aspx?Keyword=512-FPF2700MX, RS Price/Stock=http://uk.rs-online.com/web/p/products/8088966P
IC100 IC101: "Integrated Circuit", Manufacturer_Name="Linear Technology", Mouser Part Number=584-LT1963EST-2.5, Datasheet Link=https://www.mouser.com/datasheet/2/609/1963fc-1270290.pdf, Height=1.8mm, Manufacturer_Part_Number=LT1963EST-2.5, Mouser Price/Stock=https://www.mouser.com/Search/Refine.aspx?Keyword=584-LT1963EST-2.5
IC102 IC104: "Integrated Circuit", Manufacturer_Name="Linear Technology", Mouser Part Number=584-LT5560EDD#PBF, RS Part Number=7869705, Datasheet Link=https://www.analog.com/media/en/technical-documentation/data-sheets/5560f.pdf, Height=0.8mm, Manufacturer_Part_Number=LT5560EDD#PBF, Mouser Price/Stock=https://www.mouser.com/Search/Refine.aspx?Keyword=584-LT5560EDD%23PBF, RS Price/Stock=https://uk.rs-online.com/web/p/products/7869705
IC105: "Integrated Circuit", Manufacturer_Name=Microchip, Manufacturer_Part_Number=MCP6231UT-E/LT, Mouser Part Number=579-MCP6231UT-E/LT, RS Part Number=7240643P, Allied Price/Stock=http://www.alliedelec.com/microchip-technology-inc-mcp6231ut-e-lt/70414866/, Allied_Number=70414866, Datasheet Link=http://ww1.microchip.com/downloads/en/DeviceDoc/21881e.pdf, Height=1.1mm, Mouser Price/Stock=https://www.mouser.com/Search/Refine.aspx?Keyword=579-MCP6231UT-E%2FLT, RS Price/Stock=http://uk.rs-online.com/web/p/products/7240643P
IC106: "Integrated Circuit", Manufacturer_Name="ON Semiconductor", Mouser Part Number=512-FPF2004, RS Part Number=8088916P, Datasheet Link=https://www.onsemi.com/pub/Collateral/FPF2001-D.pdf, Height=1.1mm, Manufacturer_Part_Number=FPF2004, Mouser Price/Stock=https://www.mouser.com/Search/Refine.aspx?Keyword=512-FPF2004, RS Price/Stock=http://uk.rs-online.com/web/p/products/8088916P
J1: "Connector", Manufacturer_Name=SAMTEC, Mouser Part Number=200-QSH03001LDAK, RS Part Number=1587735, Datasheet Link=http://suddendocs.samtec.com/prints/qsh-xxx-01-x-d-xxx-mkt.pdf, Height=3.35mm, Manufacturer_Part_Number=QSH-030-01-L-D-A-K, Mouser Price/Stock=https://www.mouser.com/Search/Refine.aspx?Keyword=200-QSH03001LDAK, RS Price/Stock=http://uk.rs-online.com/web/p/products/1587735
J2: "Connector", Manufacturer_Name=SAMTEC, Mouser Part Number=200-QTH03002LDA, RS Part Number=7678748P, Datasheet Link=http://suddendocs.samtec.com/prints/qth-xxx-xx-x-d-xxx-mkt.pdf, Height=7.064mm, Manufacturer_Part_Number=QTH-030-02-L-D-A, Mouser Price/Stock=https://www.mouser.com/Search/Refine.aspx?Keyword=200-QTH03002LDA, RS Price/Stock=http://uk.rs-online.com/web/p/products/7678748P
J?: "Connector", Manufacturer_Name=SAMTEC, Datasheet Link=http://suddendocs.samtec.com/prints/fsi-1xx-xx-xxx-d-x-xx-xx-mkt.pdf, Height=7.4mm, Manufacturer_Part_Number=FSI-105-06-L-D-AD-TR
L18: "Inductor", Manufacturer_Name=COILCRAFT, Mouser Part Number=994-MSS5131-472MLB, Datasheet Link=http://www.coilcraft.com/pdfs/mss5131.pdf, Manufacturer_Part_Number=MSS5131-472MLB, Mouser Price/Stock=https://www.mouser.com/Search/Refine.aspx?Keyword=994-MSS5131-472MLB
L19: "Inductor", Manufacturer_Name=COILCRAFT, Mouser Part Number=994-MSS5131-103MLB, Datasheet Link=https://componentsearchengine.com/Datasheets/1/MSS5131-103MLB.pdf, Manufacturer_Part_Number=MSS5131-103MLB, Mouser Price/Stock=https://www.mouser.com/Search/Refine.aspx?Keyword=994-MSS5131-103MLB
Q1: "Integrated Circuit", Manufacturer_Name="ON Semiconductor", Mouser Part Number=512-FDC638P, RS Part Number=7614413, Datasheet Link=http://docs-emea.rs-online.com/webdocs/10e2/0900766b810e24f1.pdf, Height=1.1mm, Manufacturer_Part_Number=FDC638P, Mouser Price/Stock=https://www.mouser.com/Search/Refine.aspx?Keyword=512-FDC638P, RS Price/Stock=https://uk.rs-online.com/web/p/products/7614413
R1 R2 R3 R4 R5 R6 R7 R8 R9 R10 R11 R12 R13 R14 R15 R16 R17 R18 R19 R20 R21 R22 R23 R24 R25 R26 R27 R28 R29 R30 R31 R32 R33 R34 R35 R36 R37 R38 R39 R40 R41 R42 R100 R101 R102 R103 R104 R105 R106 R107 R108 R109 R110 R111 R112 R113 R114 R115 R116 R117 R118 R119 R120 R121 R122 R123 R124 R125 R200 R201 R202 R203 R204 R205 R206 R207 R208 R209 R210 R211 R212 R213 R214 R215 R216 R217 R218 R219 R220 R221 R222 R223 R653: "Resistor", LatestRevisionDate=17-Jul-2002, LatestRevisionNote="Re-released for DXP Platform.", PackageDescription="Axial Device, Thru-Hole; 2 Leads; 0.3 in Pin Spacing", PackageReference=AXIAL-0.3, Published=8-Jun-2000, Publisher="Altium Limited"
S1 S2: "Switch", Manufacturer_Name="C & K COMPONENTS", Mouser Part Number=611-HDT0004, RS Part Number=7931608P, Datasheet Link=https://www.ckswitches.com/media/1307/hdt.pdf, Height=3mm, Manufacturer_Part_Number=HDT0004, Mouser Price/Stock=https://www.mouser.com/Search/Refine.aspx?Keyword=611-HDT0004, RS Price/Stock=http://uk.rs-online.com/web/p/products/7931608P
Y1 Y2 Y3 Y4: "Crystal or Oscillator", Manufacturer_Name=ECS, Mouser Part Number=520-ECS-75SMF45A30B, Datasheet Link=https://www.mouser.com/datasheet/2/122/ECS_75SMF-10007.pdf, Height=0.95mm, Manufacturer_Part_Number=ECS-75SMF45A30B, Mouser Price/Stock=https://www.mouser.com/Search/Refine.aspx?Keyword=520-ECS-75SMF45A30B
L1 L2 L3 L4 L5 L6 L7 L8 L9 L10 L11 L12 L13 L14 L15 L16 L17 L100 L101 L102 L103 L104 L105 L106 L107 L108 L109 L110 L111 L112 L113 L114 L115 L116 L200 L201 L202: Code_IEC=1005, Code_JEITA=0402, LatestRevisionDate=29-May-2009, LatestRevisionNote="IPC-7351 Footprint Added.", PackageDescription="Chip Inductor", PackageReference=0402-A, Published=8-Jun-2000, Publisher="Altium Limited"

## Via types
v1: diameter 1.27, hole 0.711, Top Layer to Bottom Layer, 196 vias

## Nets (pads, with @x,y where several pads share a name; then routed paths per layer and width w, separated by ;. In a path a pad name is that pad's centre, name@x,y a point inside that pad or via, vN(x,y) a via of type N, cw(c..) or ccw(c..) an arc to the next point about the centre after c; other vN are vias at no path point)
2.5V_1: *1.2 *1.6 C101.1 | length 23.2
  Top Layer w0.254: *1.2@33.02,57.404 33.02,57.963 32.258,58.725 31.739,58.725 *1.6@31.739,59.214 31.739,61.036 32.552,61.849 39.726,61.849 40.869,62.992 v1(40.869,63.322) ; v1(45.441,63.322) 47.752,61.011 48.387,61.011 C101.1@48.387,61.022
  Bottom Layer w0.254: v1(40.869,63.322) v1(45.441,63.322)
2.5V_2: *?.2 *?.6 C113.2 R108.1 R109.1 | length 19.3
  Top Layer w0.254: v1(70.866,49.835) 71.741,48.96 C113.2@72.39,48.96 ; R108.1@72.009,52.324 72.009,50.825 72.39,50.444 C113.2@72.39,48.96 ; R109.1@73.914,48.387 73.42,48.387 72.847,48.96 C113.2@72.39,48.96
  Bottom Layer w0.254: v1(70.866,49.835) 70.866,44.591 73.115,42.342 *?.6@73.115,41.446 73.115,40.894 72.339,40.894 71.834,40.389 *?.2@71.834,39.636
2.5V_3: C214.1 C215.1 IC900.6 R203.2 R204.2 | length 45.8
  Top Layer w0.254: v1(14.021,33.172) 15.065,33.172 ; C214.1@15.065,33.615 15.065,33.172 ; C215.1@15.192,30.821 15.192,30.81 14.656,30.81 14.656,31.925 15.065,32.334 15.065,33.172 ; v1(37.643,32.069) 37.363,32.349 37.363,34.794 IC900.6@38.14,34.794 ; v1(44.221,33.223) 43.307,34.138 R203.2@43.307,35.814 44.221,35.814 44.252,35.845 R204.2@45.212,35.845
  Bottom Layer w0.254: v1(14.021,33.172) 14.961,34.112 17.288,34.112 17.872,34.696 27.915,34.696 30.984,31.627 37.201,31.627 v1(37.643,32.069) 43.067,32.069 v1(44.221,33.223)
2.83V: C14.1 C46.1 C47.1 IC1.6 IC1.12 IC1.13 IC1.16 IC3.6 IC3.12 IC3.13 IC3.16 IC10.1 R2.2 R5.1 R13.1 R15.2 R25.2 | length 71.2
  Top Layer w0.254: v1(3.378,77.622) 2.591,78.41 2.591,85.849 4.039,87.297 IC10.1@5.797,87.297 ; R5.1@21.082,78.249 21.082,77.953 21.59,77.445 R2.2@21.59,77.185 22.225,77.185 22.727,76.683 R13.1@23.368,76.683 23.724,76.327 v1(24.968,76.327) ; v1(25.324,69.139) 25.324,68.552 R25.2@25.575,68.162 ; C47.1@29.845,70.231 C46.1@30.988,70.231 C14.1@32.131,70.231 32.664,70.231 32.664,71.374 32.41,71.628 ; 32.41,71.628 31.852,72.187 v1(30.582,72.187) 31.085,71.684 32.106,71.684 32.161,71.628 32.41,71.628
  Bottom Layer w0.254: v1(3.378,77.622) 4.394,76.606 7.671,76.606 9.157,78.092 12.408,78.092 13.487,77.013 17.12,77.013 17.805,76.327 v1(24.968,76.327) 26.314,77.673 28.419,77.673 30.172,75.921 32.512,75.921 32.868,75.565 32.868,73.166 31.888,72.187 v1(30.582,72.187) 28.372,72.187 v1(25.324,69.139)
3.0V: C67.2 C69.2 IC6.5 IC18.1 R41.1 | length 121.9
  Top Layer w0.254: v1(18.085,85.827) 18.085,84.089 IC6.5@18.095,84.089 ; C67.2@32.893,37.18 31.623,37.18 C69.2@31.369,36.926 31.369,37.592 31.979,38.202 v1(32.893,38.202) ; R41.1@48.133,81.486 v1(48.133,80.391) 47.092,81.432 47.092,85.293 48.114,86.316 48.539,86.316 48.66,86.436 49.886,86.436 50.571,87.122 IC18.1@51.263,87.122 52.324,87.122 v1(53.111,86.335)
  Bottom Layer w0.254: v1(18.085,85.827) 21.615,82.296 32.588,82.296 32.944,81.94 43.104,81.94 45.568,84.404 52.832,84.404 53.111,84.684 v1(53.111,86.335) ; v1(32.893,38.202) 35.814,35.281 48.387,35.281 49.682,36.576 49.682,55.829 48.031,57.48 48.031,69.367 47.93,69.469 47.93,80.188 v1(48.133,80.391)
3.0V_1: C102.2 C103.2 C122.2 C125.2 C134.2 C138.1 IC100.1 IC101.1 IC102.2 IC105.5 IC106.1 L106.1 L108.2 L115.1 R120.1 | length 167.1
  Top Layer w0.254: IC100.1@8.396,25.829 8.396,25.629 12.04,21.985 IC101.1@12.04,20.715 ; IC101.1@12.017,20.715 IC101.1@12.04,20.715 ; v1(16.205,20.715) IC101.1@12.04,20.715 ; C102.2@33.782,49.595 33.782,50.089 ; L106.1@33.782,53.594 33.782,50.089 ; v1(34.798,50.089) 33.782,50.089 ; v1(37.236,50.089) 38.989,50.089 C103.2@38.989,49.657 ; C134.2@56.642,11.749 v1(56.642,12.725) v1(57.785,13.868) 58.166,14.249 IC106.1@58.166,19.304 ; L108.2@58.547,8.478 58.77,8.701 C122.2@62.484,8.701 ; v1(60.122,8.661) 62.484,8.661 C122.2@62.484,8.701 ; v1(60.122,11.532) 60.418,11.828 R120.1@62.179,11.828 ; C138.1@61.341,16.51 61.062,16.51 60.808,16.764 60.808,17.78 61.316,18.288 61.58,18.288 62.382,19.09 ; R120.1@62.182,11.828 R120.1@62.179,11.828 ; IC105.5@63.358,20.696 63.358,20.168 ; L115.1@66.04,11.557 66.04,11.455 65.532,11.455 64.897,10.82 C125.2@64.897,8.828 63.754,8.828 63.627,8.701 C122.2@62.484,8.701 ; R120.1@62.179,11.828 62.179,12.598 62.382,12.802 62.382,19.09 ; 62.382,19.09 63.358,20.066 63.358,20.168 ; 62.382,19.09 62.382,19.192 63.358,20.168
  Bottom Layer w0.254: v1(16.205,20.715) 24.195,12.725 ; v1(37.236,50.089) v1(34.798,50.089) 28.358,43.649 22.834,43.649 13.005,33.819 13.005,15.215 15.494,12.725 24.195,12.725 ; v1(56.642,12.725) 24.195,12.725 ; v1(57.785,13.868) v1(60.122,11.532) v1(60.122,8.661)